# EAGLE board Arduino_I2C_Motor-Driver (EAGLE 8.6.0)

Size 100 x 80 mm. Coordinates in mm from the lower left corner, seen from the top.
Outline: 0,0 100,0 100,80 0,80 0,0
Copper layers (1*16): Top 0.035mm / dielectric 1.5mm / Bottom 0.035mm
Design rules "default *": minimum track width 20mil, minimum drill 0.35mm, track to track 20mil, track to pad 20mil, pad to pad 20mil, via to via 20mil, smd to smd 20mil, copper to edge 40mil, drill to drill 6mil, minimum pad ring 10mil, minimum via ring 8mil, stop-mask expansion 4mil, vias tented up to drill 0mil, thermal gap 10mil

## Footprints (pad centres in the part's own frame; a part is rotated, then mirrored left to right if it is on the bottom)
1X16 = drill 1.016 long: 1 -19.05,0; 2 -16.51,0; 3 -13.97,0; 4 -11.43,0; 5 -8.89,0; 6 -6.35,0; 7 -3.81,0; 8 -1.27,0; 9 1.27,0; 10 3.81,0; 11 6.35,0; 12 8.89,0; 13 11.43,0; 14 13.97,0; 15 16.51,0; 16 19.05,0
1X08 = drill 1.016 long: 1 -8.89,0; 2 -6.35,0; 3 -3.81,0; 4 -1.27,0; 5 1.27,0; 6 3.81,0; 7 6.35,0; 8 8.89,0
2X05 = drill 1.016 octagon: 1 -5.08,-1.27; 2 -5.08,1.27; 3 -2.54,-1.27; 4 -2.54,1.27; 5 0,-1.27; 6 0,1.27; 7 2.54,-1.27; 8 2.54,1.27; 9 5.08,-1.27; 10 5.08,1.27
1X13 = drill 1.016 long: 1 -15.24,0; 2 -12.7,0; 3 -10.16,0; 4 -7.62,0; 5 -5.08,0; 6 -2.54,0; 7 0,0; 8 2.54,0; 9 5.08,0; 10 7.62,0; 11 10.16,0; 12 12.7,0; 13 15.24,0
ARDUINOR3-BPLACE = drill 1 pad 1.676 octagon: 3V 35.56,2.54; 5V 38.1,2.54; A0 50.8,2.54; A1 53.34,2.54; A2 55.88,2.54; A3 58.42,2.54; A4 60.96,2.54; A5 63.5,2.54; AREF 23.876,50.8; D0 63.5,50.8; D1 60.96,50.8; D2 58.42,50.8; D3 55.88,50.8; D4 53.34,50.8; D5 50.8,50.8; D6 48.26,50.8; D7 45.72,50.8; D8 41.656,50.8; D9 39.116,50.8; D10 36.576,50.8; D11 34.036,50.8; D12 31.496,50.8; D13 28.956,50.8; GND 26.416,50.8; GND1 43.18,2.54; GND2 40.64,2.54; IOREF 30.48,2.54; RESERVED 27.94,2.54; RESET 33.02,2.54; SCL 18.796,50.8; SDA 21.336,50.8; VIN 45.72,2.54

## Placement (x,y rotation side)
JP1  [1X16]  21.59,76.2 0 top
JP2  [1X08]  21.59,56.5 0 top
JP3  [2X05]  85.07,44.17 90 top
JP4  [2X05]  85.07,18.04 90 top
JP5  [1X13]  75.52,77.39 0 top
JP6  [1X13]  75.23,62.39 0 top
U1  ARDUINOR3-BPLACE  [ARDUINOR3-BPLACE]  1.21,0.54 0 top

## Library data of the parts
JP1-JP6 = pinhead
U1 = adafruit

## Nets
N$1: JP2.2 U1.D8
N$2: JP2.3 U1.D9
N$3: JP2.1 U1.D7
N$4: JP2.4
N$5: JP2.5 U1.D11
N$6: JP1.1 JP3.2
N$7: JP1.2 JP3.4
N$8: JP2.6 U1.A0
N$9: JP1.3 JP3.6
N$10: JP1.4 JP3.8
N$11: JP1.5 JP3.1
N$12: JP1.6 JP3.3
N$13: JP1.7 JP3.5
N$14: JP1.8 JP3.7
N$15: JP1.9 JP4.2
N$16: JP1.10 JP4.4
N$17: JP1.11 JP4.6
N$18: JP1.12 JP4.8
N$19: JP1.13 JP4.1
N$20: JP1.14 JP4.3
N$21: JP1.15 JP4.5
N$22: JP1.16 JP4.7
N$23: JP5.1 U1.SCL
N$24: JP5.2 U1.SDA
N$25: JP5.3 U1.AREF
N$26: JP5.4 U1.GND
N$27: JP5.5 U1.D13
N$28: JP5.6 U1.D12
N$29: JP5.7 U1.D6
N$30: JP5.8 U1.D5
N$31: JP5.9 U1.D4
N$32: JP5.10 U1.D3
N$33: JP5.11 U1.D2
N$34: JP5.12 U1.D1
N$35: JP5.13 U1.D0
N$36: JP6.1 U1.RESERVED
N$37: JP6.2 U1.IOREF
N$38: JP6.3 U1.RESET
N$39: JP6.4 U1.3V
N$40: JP6.5 U1.GND1
N$41: JP6.6 U1.VIN
N$42: JP6.7 U1.A1
N$43: JP6.8 U1.A2
N$44: JP6.9 U1.A3
N$45: JP6.10 U1.A4
N$46: JP6.11 U1.A5
PE: JP2.8 JP3.10 JP4.10 JP6.13 U1.GND2
V+: JP2.7 JP3.9 JP4.9 JP6.12 U1.5V

## Tracks (layer width: path | path; a pad name or v marks a point on that pad's centre or on a via)
N$1  (1 unrouted)
N$2  (1 unrouted)
N$3  (1 unrouted)
N$5  (1 unrouted)
N$6  (1 unrouted)
N$7  (1 unrouted)
N$8  (1 unrouted)
N$9  (1 unrouted)
N$10  (1 unrouted)
N$11  (1 unrouted)
N$12  (1 unrouted)
N$13  (1 unrouted)
N$14  (1 unrouted)
N$15  (1 unrouted)
N$16  (1 unrouted)
N$17  (1 unrouted)
N$18  (1 unrouted)
N$19  (1 unrouted)
N$20  (1 unrouted)
N$21  (1 unrouted)
N$22  (1 unrouted)
N$23  (1 unrouted)
N$24  (1 unrouted)
N$25  (1 unrouted)
N$26  (1 unrouted)
N$27  (1 unrouted)
N$28  (1 unrouted)
N$29  (1 unrouted)
N$30  (1 unrouted)
N$31  (1 unrouted)
N$32  (1 unrouted)
N$33  (1 unrouted)
N$34  (1 unrouted)
N$35  (1 unrouted)
N$36  (1 unrouted)
N$37  (1 unrouted)
N$38  (1 unrouted)
N$39  (1 unrouted)
N$40  (1 unrouted)
N$41  (1 unrouted)
N$42  (1 unrouted)
N$43  (1 unrouted)
N$44  (1 unrouted)
N$45  (1 unrouted)
N$46  (1 unrouted)
PE  (4 unrouted)
V+  (4 unrouted)